# Altium PCB Guitar Input PCB.PcbDoc
Units mil, origin at the board's own origin, x right, y up, seen from the top; angles counter-clockwise.
Board outline 1700 x 1000 mil, 2 copper layers (Top Layer, Bottom Layer); 19 components, 10 nets, 49 pads, 17 vias.
Unrouted connection lines stored in the file: 9.
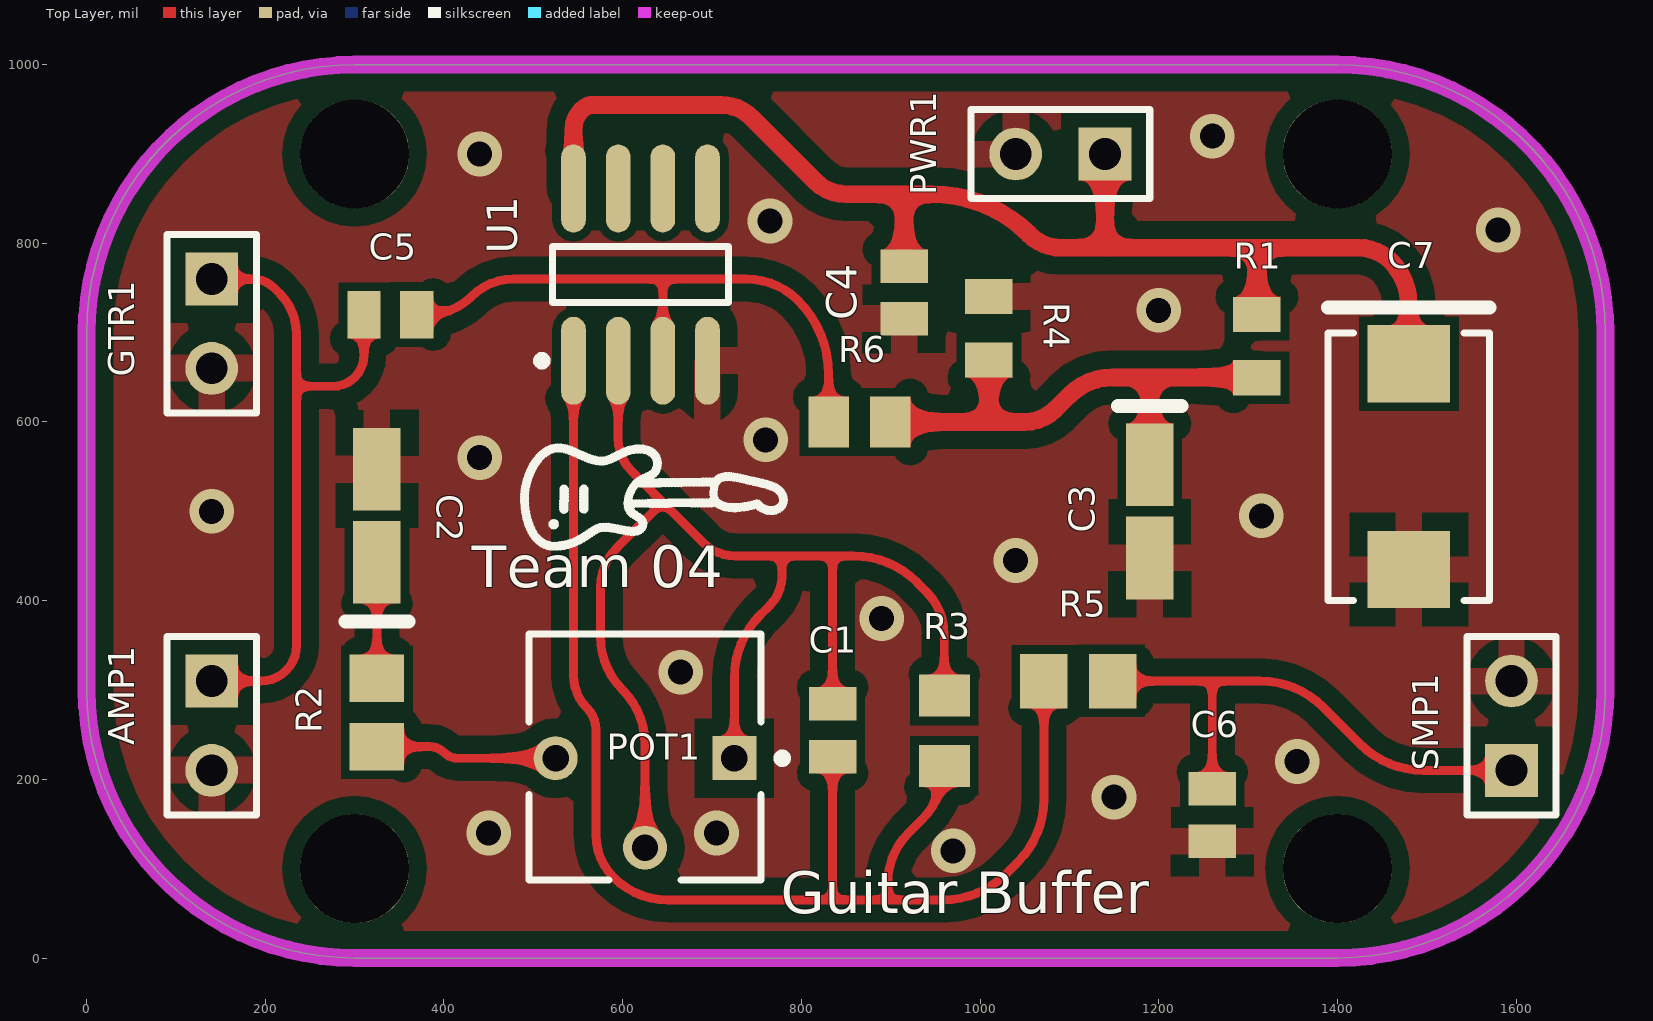
[diagram p0: Top Layer view]
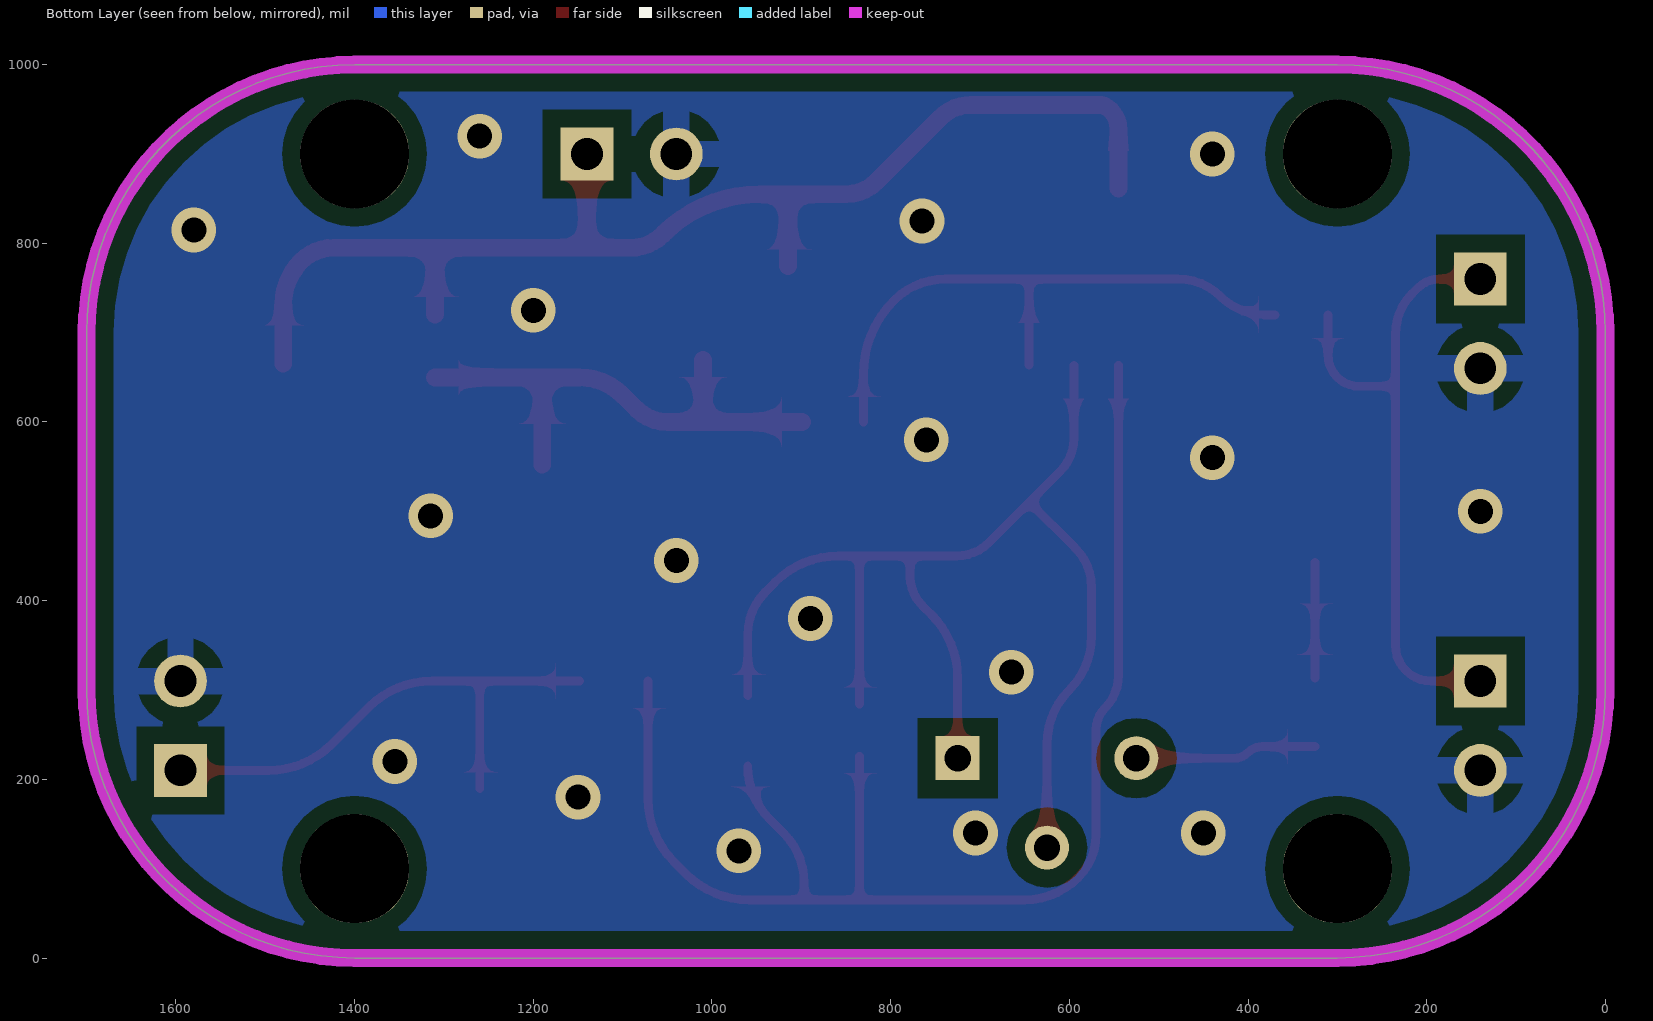
[diagram p1: Bottom Layer view, seen from below]

## Layer stack, top to bottom
Top Solder: solder mask 0.4, Solder Resist, Dk 3.5
Top Layer: signal copper 1.4
Dielectric 1: dielectric 12.6, FR-4, Dk 4.8
Bottom Layer: signal copper 1.4
Bottom Solder: solder mask 0.4, Solder Resist, Dk 3.5

## Board outline
0,300 0,700 cw(c300,700) 300,1000 1400,1000 cw(c1400,700) 1700,700 1700,300 cw(c1400,300) 1400,0 300,0 cw(c300,300)

## Design rules (kind name [scope] priority, off if disabled: settings)
Clearance [All] p1: gap=10 ignorepadtopadclearanceinfootprint=FALSE except(0: Arc-Hole Track-Hole SMDPad-Hole THPad-Hole Via-Hole Fill-Hole Poly-Hole Region-Hole Text-Hole; 20: Arc-Fill Arc-Poly Arc-Region Track-Fill Track-Poly Track-Region THPad-Fill THPad-Poly THPad-Region Via-Fill Via-Poly Via-Region Fill-Fill Fill-Poly Fill-Region Poly-Poly Poly-Region Region-Region)
HoleSize [All] p1: absolutevalues=TRUE maxlimit=200 minlimit=1 maxpercent=80.000 minpercent=20.000
MinimumSolderMaskSliver [All] p1: minsoldermaskwidth=0
PolygonConnect [All] p1: thpad.connectstyle=Relief thpad.reliefconductorwidth=30 thpad.reliefentries=4 thpad.polygonreliefangle="90 Angle" thpad.airgapwidth=20 smdpad.connectstyle=Relief smdpad.reliefconductorwidth=30 smdpad.reliefentries=4 smdpad.polygonreliefangle="90 Angle" smdpad.airgapwidth=20 via.connectstyle=Direct via.reliefconductorwidth=30 via.reliefentries=4 via.polygonreliefangle="90 Angle" via.airgapwidth=20
RoutingVias [All] p1: holewidth=28 width=50 viastyle="Through Hole" minholewidth=28 minwidth=50 maxholewidth=28 maxwidth=50
SolderMaskExpansion [All] p1: expansion=4 istentingtop=FALSE
Width Width_1 [InNet('+2V5') OR InNet('+5V')] p1: maxlimit=30 minlimit=20 preferedwidth=25 minimp=50.000000 maximp=50.000000 favimp=50.000000
Width [All] p2: maxlimit=25 minlimit=10 preferedwidth=20 minimp=50.000000 maximp=50.000000 favimp=50.000000
28 further rules are at their usual default settings.

## Classes and differential pairs
component class "Guitar Input Schematic": C1 C2 C3 R1 R3 R4

## Components (designator, comment, footprint, x,y, rotation, side; value= is the part's Value field where it differs from the comment)
AMP1 "AMPLIFIER_INPUT" HDR1X2 140,310 r270 top
C1 "270pF" FP-C0805C-DN-MFG 835,255 r270 top value="270 pF"
C2 "10uF" KEMT-A-3216-18-2_M 325,495 r90 top
C3 "10uF" KEMT-A-3216-18-2_M 1190,500 r270 top
C4 "100 nF" FP-C0805C-DN-MFG 915,745 r270 top value="0.10 μF"
C5 "100nF" FP-C0805C-DN-MFG 340,720 r0 top value="0.10 μF"
C6 "270pF" FP-C0805C-DN-MFG 1260,160 r90 top value="270 pF"
C7 "100 uF" KEMT-T491-D_L 1480,550 r270 top
GTR1 "GUITAR_OUTPUT" HDR1X2 140,760 r270 top
POT1 "100K" BOUR-3362P 625,225 r180 top
PWR1 "POWER" HDR1X2 1140,900 r180 top
R1 "10K" RESC2013X60X35NL10T20 1310,685 r90 top
R2 "470" RESC2013X70X40ML20T20 325,275 r270 top
R3 "100K" RESC2013X60X35ML10T20 960,254.37 r270 top
R4 "10K" RESC2013X60X35NL10T20 1010,705 r270 top
R5 "470" RESC2013X70X40ML20T20 1110,310 r0 top
R6 "1M" RESC2013X70X40NL20T20 865,600 r180 top
SMP1 "SAMPLED_SIGNAL" HDR1X2 1595,210 r90 top
U1 "MCP6002" SOIC-SN8_M 620,765 r90 top

## Footprints (in the part's own frame and the unit in brackets; to place one, negate y for a bottom-side part, rotate by r counter-clockwise, add the part's x,y. Pads: shape width x height; smd on the part's side, far side on the other; paste and mask are expansions set on the pad)
BOUR-3362P [mm] "THD, 3-Leads, Body 6.6x6.99mm, Pitch 2.54mm"
  rect 1.25x1.25 hole 0.75: 1(-2.54,0.035)
  round 1.25 hole 0.75: 2(0,2.575) 3(2.54,0.035)
  silkscreen extent -4.03,-3.49 3.3,3.5, body extent -3.3,-3.49 3.3,3.49, height 4.95
FP-C0805C-DN-MFG [mm]
  rect 0.95x1.35 smd paste+0 mask+0: 1(-0.75,0) 2(0.75,0)
  body extent -1.4,-0.85 1.4,0.85, height 0.25
HDR1X2 [mm] "Connector; Header; 2 Position"
  rect 1.5x1.5 hole 0.9: 1(0,0)
  round 1.5 hole 0.9: 2(2.54,0)
  silkscreen extent -1.27,-1.27 3.81,1.27
KEMT-A-3216-18-2_M [mm] "Molded TAN Capacitor, 2-Leads, Body 3.4x1.8mm, IPC Low Density"
  rect 2.35x1.35 smd: 1(-1.325,0) 2(1.325,0)
  silkscreen extent -3,-0.9 -3,0.9, body extent -1.7,-0.9 1.7,0.9, height 1.8
KEMT-T491-D_L [mm] "Molded Capacitor, 2-Leads, Body 7.60x4.60mm, IPC High Density"
  rect 2.2x2.35 smd: 1(-2.925,0) 2(2.925,0)
  silkscreen extent -4.52,-2.3 3.8,2.3, body extent -3.8,-2.3 3.8,2.3, height 3.1
RESC2013X60X35ML10T20 [mm] "Chip Resistor, 2-Leads, Body 2.1x1.35mm, IPC Low Density"
  rect 1.2x1.45 smd: 1(-1,0) 2(1,0)
  body extent -1.05,-0.68 1.05,0.67, height 0.6
RESC2013X60X35NL10T20 [mm] "Chip Resistor, 2-Leads, Body 2.1x1.35mm, IPC Medium Density"
  rect 1x1.35 smd: 1(-0.9,0) 2(0.9,0)
  body extent -1.05,-0.68 1.05,0.67, height 0.6
RESC2013X70X40ML20T20 [mm] "Chip Resistor, 2-Leads, Body 2.00x1.25mm, IPC Low Density"
  rect 1.35x1.55 smd: 1(-0.975,0) 2(0.975,0)
  body extent -1.1,-0.72 1.1,0.72, height 0.7
RESC2013X70X40NL20T20 [mm] "Chip Resistor, 2-Leads, Body 2.2x1.35mm, IPC Medium Density"
  rect 1.15x1.45 smd: 1(-0.875,0) 2(0.875,0)
  body extent -1.1,-0.72 1.1,0.72, height 0.7
SOIC-SN8_M [mm] "SOIC, 8-Leads, Body 4.9x3.9mm, Pitch 1.27mm, IPC Low Density"
  oval 2.5x0.7 smd: 1(-2.45,1.905) 2(-2.45,0.635) 3(-2.45,-0.635) 4(-2.45,-1.905) 5(2.45,-1.905) 6(2.45,-0.635) 7(2.45,0.635) 8(2.45,1.905)
  silkscreen extent -2.57,-2.5 0.8,2.93, body extent -2,-2.5 2,2.5, height 1.75

## Part data
AMP1 GTR1 PWR1 SMP1: library part "Header 2", "Header, 2-Pin", LatestRevisionDate=17-Jul-2002, LatestRevisionNote="Re-released for DXP Platform.", Publisher="Altium Limited"
C1 C6: library part CMP-1036-02406-3, "CAP CER 270PF 50V C0G/NP0 0805", Capacitance="270 pF", Manufacturer=KEMET, Manufacturer Part Number=C0805C271J5GACTU, Package=C0805C-DN, Temperature="-55°C to +125°C", Temperature Characteristic=C0G, Temperature Coefficient=30ppm/°C, Temperature Range High=+125°C, Temperature Range Low=-55°C, Tolerance=0.05, Voltage Rating="50 V", Automotive=No, Category=Cap, ComponentLink2Description=Datasheet, ComponentLink2URL=https://content.kemet.com/datasheets/KEM_C1003_C0G_SMD.pdf, Device Class L1="Passive Components", Device Class L2=Capacitors, Device Class L3="Ceramic Capacitors", Digikey Description="CAP CER 270PF 50V C0G/NP0 0805", Height=0.88mm, Ipc Land Pattern Name=CAPC200125X78, Lead Free=Yes, Material=Ceramic, Mouser Description="Multilayer Ceramic Capacitors MLCC - SMD/SMT 50volts 270pF C0G 5%", Octopart=https://octopart.com/c0805c271j5gactu-kemet-104903, RoHS=TRUE
C2 C3: library part CMP-2000-05172-1, "Capacitor, Tantalum, 10 uF, +/- 10%, 10 V, -55 to 125 degC, 2-Pin SMD (1206), RoHS, Tape and Reel", Capacitance=10µF, ESR (Equivalent Series Resistance)=3.8Ohm, Lifetime @ Temp.=2000Hrs@85degC, Manufacturer=Kemet, Manufacturer Size Code=A, Operating Temperature=-55degC~125degC, Package / Case=1206(3216Metric), Package Description="2-Pin Surface Mount Device, Body 3.2 x 1.6 mm", Package Reference=1206, Standard Package=2,000, Tolerance=±10%, Voltage - Rated=10V, Catalog Drawings=T49x,T5xxSeries_A-side1T49x,T5xxSeries_A,B-side2T49x,T5xxSeries_A,SBottom, Category=Capacitors, Datasheet URL=http://www.farnell.com/datasheets/1824869.pdf, Datasheet Version=Apr-14, Family=TantalumCapacitors, Features=GeneralPurpose, Height - Seated (Max)="0.071\"(1.80mm)", Lead Spacing=-, Manufacturer URL=http://www.kemet.com/, Mounting Type=SurfaceMount, Online Catalog=T491Series, Other Names=399-3684-2, Packaging=Tape&Reel(TR), Product Training Modules=CapacitorBasics-TypicalUsesforCapacitorsDeratingGuidelinesforSurfaceMountTantalumCapacitors, Series=T491, Size / Dimension="0.126\"Lx0.063\"W(3.20mmx1.60mm)", Type=Molded
C4 C5: library part CMP-2007-00279-2, "CAP CER 0.1UF 50V X7R 0805", Capacitance="0.10 μF", Manufacturer=KEMET, Manufacturer Part Number=C0805C104K5RACTU, Package=C0805C-DN, Temperature="-55°C to +125°C", Temperature Characteristic=X7R, Temperature Coefficient=30ppm/°C, Temperature Range High=+125°C, Temperature Range Low=-55°C, Tolerance=0.1, Voltage Rating="50 V", Automotive=No, Category=Cap, ComponentLink2Description=Datasheet, ComponentLink2URL=https://content.kemet.com/datasheets/KEM_C1003_C0G_SMD.pdf, Device Class L1="Passive Components", Device Class L2=Capacitors, Device Class L3="Ceramic Capacitors", Digikey Description="CAP CER 0.1UF 50V X7R 0805", Height=0.88mm, Ipc Land Pattern Name=CAPC200125X78, Lead Free=Yes, Material=Ceramic, Mouser Description="Cap Ceramic 0.1uF 50V X7R 10% SMD 2.0 x 1.2 mm 125 C Paper T/R", Octopart=https://octopart.com/c0805c104k5ractu-kemet-143926, RoHS=TRUE
C7: library part CMP-2000-07541-1, "Tantalum Surface Mount Capacitor, 100 uF, +/- 10%, 16 V, -55 to 125 degC, 2917 (7343 Metric), RoHS, Tape and Reel", Capacitance=100uF, Case Code (Imperial)=2917, Case Code (Metric)=7343, Case\/Package=Molded, Dielectric Material=Tantalum, ESR (Equivalent Series Resistance)=700mOhm, Leakage Current=16uA, Manufacturer=Kemet, Max Operating Temperature=125degC, Min Operating Temperature=-55degC, Package Description="2-Pin Surface Mount Device, Body 7.3 x 4.3 mm", Package Quantity=1, Package Reference=T491-D, Ripple Current=463mA, Tolerance=10%, Voltage=16V, Datasheet URL=http://www.kemet.com/Lists/ProductCatalog/Attachments/254/KEM_T2005_T491.pdf, Datasheet Version=07/2017, Depth=4.3mm, Dissipation Factor=8%, Height=2.8mm, Height - Seated (Max)=0.122inch, Lead Free=LeadFree, Lead Pitch=3.6mm, Length=7.3mm, Life (Hours)=2000Hour, Manufacturer URL=http://www.kemet.com/, Mount=PCB, Mounting Technology=SurfaceMount, Packaging=TapeandReel, Polarity=Polar, Radiation Hardening=No, REACH SVHC=NoSVHC, RoHSCompliant=true, Termination=SMD/SMT, Voltage Rating=16V, Voltage Rating (DC)=16V, Weight=0.023634oz, Width=4.3mm
POT1: library part CMP-1747-00003-1, "Square Trimpot(R) Trimming Potentiometer, 100 KOhm, 300 V, -55 to 125 degC, 3-Pin THD, RoHS, Tube", Case\Package=Axial, Max Operating Temperature="155 degC", Min Operating Temperature="-55 degC", Package Quantity=200, Power Rating="250 mW", Resistance="1 mohm", Tolerance=1%, Voltage Rating="250 V", ComponentLink1Description="Manufacturer URL", ComponentLink1URL=http://www.bourns.com/, ComponentLink2Description=Datasheet, ComponentLink2URL=http://www.bourns.com/docs/Product-Datasheets/3362.pdf, DatasheetVersion=May-16, Length="0.248 inch", Mount="Through Hole", PackageDescription="3-Pin Through Hole Device, Body 6.6 x 6.99 mm, Pitch 2.54 mm", PackageReference=3326P, Packaging=Bulk, RoHSCompliant=true
R1 R4: library part CMP-1659-00013-4, "Chip Resistor, 10 KOhm, +/- 1%, 0.125 W, -55 to 155 degC, 0805 (2012 Metric), RoHS, Tape and Reel", Manufacturer=Yageo, Max Operating Temperature="155 degC", Min Operating Temperature="-55 degC", Package Quantity=5000, Voltage Rating="150 V", ComponentLink1Description="Manufacturer URL", ComponentLink1URL=http://www.yageo.com/, ComponentLink2Description=Datasheet, ComponentLink2URL=http://www.yageo.com/documents/recent/PYu-RC_Group_51_RoHS_L_04.pdf, DatasheetVersion="Rev. 4, 02/2016", Height="0.5 mm", Length="2 mm", Mount="Surface Mount", Mounting Technology="Surface Mount", PackageDescription="2-Pin Surface Mounted Device, Body 2 x 1.25 mm", PackageReference=0805, Packaging="Tape and Reel", Pins=2, REACH SVHC="No SVHC", RoHSCompliant=true
R2 R5: library part CMP-2001-00549-5, "Chip Resistor, 470 Ohm, +/- 1%, 0.125 W, -55 to 155 degC, 0805 (2012 Metric), RoHS, Tape and Reel", Manufacturer=Panasonic, Max Operating Temperature="155 degC", Min Operating Temperature="-55 degC", Package Quantity=1, Voltage Rating="150 V", ComponentLink1Description="Manufacturer URL", ComponentLink1URL=http://www.panasonic.com/, ComponentLink2Description=Datasheet, ComponentLink2URL=http://industrial.panasonic.com/cdbs/www-data/pdf/RDA0000/AOA0000C86.pdf, DatasheetVersion=04/2015, Height="0.6 mm", Length="2 mm", Mount="Surface Mount", Mounting Technology="Surface Mount", PackageDescription="2-Pin Surface Mount Device, Body 2 x 1.25 mm", PackageReference=0805, Packaging="Cut Tape", Pins=2, REACH SVHC=Yes, RoHSCompliant=true
R3: library part CMP-2100-03668-1, "Chip Resistor, 100 KOhm, +/- 1%, 0.125 W, -55 to 155 degC, 0805 (2012 Metric), RoHS, Tape and Reel", Case Code (Imperial)=0805, Case Code (Metric)=2012, Manufacturer=Yageo, Max Operating Temperature=155degC, Max Power Dissipation=125mW, Min Operating Temperature=-55degC, Package Description="2-Pin Surface Mounted Device, Body 2 x 1.25 mm", Package Quantity=1, Resistance=100KOhm, Temperature Coefficient=100ppm/degreesC, Tolerance=1%, Voltage Rating=150V, Case/Package=0805, Composition=ThickFilm, Datasheet URL=http://www.yageo.com/NewPortal/yageodocoutput?fileName=/pdf/R-Chip/PYu-RC_Group_51_RoHS_L_5.pdf, Datasheet Version="Rev. 5, 10/2016", Depth=1.25mm, Height=0.024inch, Lead Free=LeadFree, Lead Pitch=0.4mm, Length=2mm, Manufacturer URL=http://www.yageo.com/, Military Standard=Not, Number of Pins=2, Number of Terminations=2, Package Reference=0805, Packaging=TapeandReel, Power Rating=125mW, REACH SVHC=Unknown, RoHSCompliant=true, Termination=SMD/SMT, Voltage Rating (DC)=150V, Width=0.049inch
R6: library part CMP-2001-04378-5, "Chip Resistor, 1000 KOhm, +/- 1%, 0.125 W, -55 to 155 degC, 0805 (2012 Metric), RoHS, Tape and Reel", Manufacturer=Panasonic, Max Operating Temperature="155 degC", Min Operating Temperature="-55 degC", Package Quantity=5000, Voltage Rating="150 V", ComponentLink1Description="Manufacturer URL", ComponentLink1URL=http://www.panasonic.com/, ComponentLink2Description=Datasheet, ComponentLink2URL=http://industrial.panasonic.com/cdbs/www-data/pdf/RDA0000/AOA0000C86.pdf, DatasheetVersion=04/2015, Height="0.6 mm", Length="2 mm", Mount="Surface Mount", Mounting Technology="Surface Mount", PackageDescription="2-Pin Surface Mount Device, Body 2 x 1.25 mm", PackageReference=0805, Packaging="Tape and Reel", Pins=2, REACH SVHC=Yes, RoHSCompliant=true
U1: library part CMP-0187-00368-2, "1 MHz, Low-Power Operational Amplifier, 8-Pin SOIC, Extended Temperature", Code_IPC=SOIC127P600-8, Code_JEDEC=MS-012, ComponentLink1Description="Manufacturer URL", ComponentLink1URL=http://www.microchip.com/, ComponentLink2Description=Datasheet, ComponentLink2URL=http://ww1.microchip.com/downloads/en/DeviceDoc/21733j.pdf, ComponentLink3Description="Package Specification", ComponentLink3URL=http://www.microchip.com/stellent/groups/techpub_sg/documents/packagingspec/en012702.pdf, DatasheetVersion="revJ, Nov-2009", PackageDescription="8-Lead Plastic Small Outline (SN) - Narrow, 3.90mm Body [SOIC]", PackageReference=SOIC-SN8, PackageVersion="revBB, Aug-2009", RevisionNote="URLs added."

## Free pads (board coordinates)
  round 122.05 hole 122.05: MNT(300,100) MNT(300,900) MNT(1400,100) MNT(1400,900)

## Via types
v1: diameter 50, hole 28, Top Layer to Bottom Layer, tented both sides, 17 vias

## Nets (pads, with @x,y where several pads share a name; then routed paths per layer and width w, separated by ;. In a path a pad name is that pad's centre, name@x,y a point inside that pad or via, vN(x,y) a via of type N, cw(c..) or ccw(c..) an arc to the next point about the centre after c; other vN are vias at no path point)
+2V5: C3.1 R1.1 R4.2 R6.1 | length 593.6
  Top Layer w20: R6.1 1010,600 ; R4.2 1010,600 ; C3.1 1190,650 ; R1.1@1310,650 1190,650 ; 1010,600 1050,600 ccw(c1050,648.28) 1084.14,614.14 1100,630 cw(c1148.28,581.72) 1148.28,650 1190,650
+5V: C4.1 C7.1 PWR1.1 R1.2 U1.8 | length 1435.3
  Top Layer w20: U1.8 545,927.93 cw(c574.14,927.93) 553.54,948.54 555,950 cw(c567.07,937.93) 567.07,955 709.79,955 cw(c709.79,906.21) 744.29,940.71 815.86,869.14 ccw(c850,903.28) 850,855 915,855 ; C4.1 915,855 ; PWR1.1 1140,795 ; R1.2 1310,795 ; C7.1 1480,731.72 ccw(c1411.72,731.72) 1460,780 ccw(c1423.79,743.79) 1423.79,795 1310,795 ; 915,855 946.36,855 cw(c946.36,701.36) 1055,810 ccw(c1091.21,846.21) 1091.21,795 1140,795 ; 1140,795 1310,795
GND: AMP1.2 C2.2 C3.2 C4.2 C6.1 C7.2 GTR1.2 PWR1.2 R4.1 SMP1.2 U1.4
  other v1: 970,120 450,140 705,140 1150,180 1355,220 665,320 890,380 1040,445 1315,495 140,500 440,560 760,580 1200,725 1580,815 765,825 440,900 1260,920
NetAMP1_1: AMP1.1 C5.1 GTR1.1 | length 738.5
  Top Layer w10: AMP1.1 195,310 ccw(c195,350) 223.24,321.67 ccw(c195,350) 235,350 235,640 ; GTR1.1 185.86,760 cw(c185.86,725.86) 210,750 215.86,744.14 cw(c169.64,697.93) 235,697.93 235,640 ; C5.1 310.47,675.28 cw(c274.72,675.28) 300,650 cw(c275.86,674.14) 275.86,640 235,640
NetC1_1: C1.1 POT1.1 POT1.2 R3.1 U1.2 | length 1457.4
  Top Layer w10: U1.2@595,663.54 595,581.42 ccw(c646.72,581.42) 610.15,544.85 644.64,510.36 ; POT1.2 625,239.64 ccw(c539.64,239.64) 600,300 cw(c660.36,360.36) 575,360.36 575,414.64 cw(c637.93,414.64) 593.43,459.14 644.64,510.36 ; POT1.1 725,313.58 cw(c825,313.58) 754.29,384.29 765,395 ccw(c733.11,426.89) 778.21,426.89 778.21,450 ; C1.1 835,450 ; R3.1 960,361.72 ccw(c891.72,361.72) 940,410 929.29,420.71 ccw(c858.58,350) 858.58,450 835,450 ; 644.64,510.36 655,500 689.85,465.15 ccw(c726.42,501.72) 726.42,450 778.21,450 ; 778.21,450 835,450
NetC1_2: C1.2 R3.2 R5.1 U1.1 | length 1597.9
  Top Layer w10: U1.1@545,663.54 545,316.21 ccw(c596.21,316.21) 560,280 cw(c535.86,255.86) 570,255.86 570,138.28 ccw(c638.28,138.28) 590,90 ccw(c650.36,150.36) 650.36,65 835,65 ; C1.2 835,65 ; R3.2 cw(c875.5,215) 935.25,155.25 920,140 ccw(c976.04,83.96) 896.79,83.96 896.79,65 ; R5.1 1071.61,178.04 cw(c971.61,178.04) 1042.32,107.32 1029.29,94.29 cw(c958.58,165) 958.58,65 896.79,65 ; 835,65 896.79,65
NetC2_1: C2.1 R2.1 | length 129.4
  Top Layer w10: R2.1 C2.1
NetC5_2: C5.2 R6.2 U1.3 | length 685.5
  Top Layer w10: C5.2 381.72,720 ccw(c381.72,788.28) 430,740 cw(c478.28,691.72) 478.28,760 645,760 ; U1.3@645,663.54 645,760 ; R6.2 830.55,653.25 830.55,653.31 ccw(c713.46,653.31) 796.21,736.16 ccw(c738.58,678.43) 738.58,760 645,760
NetC6_2: C6.2 R5.2 SMP1.1 | length 599.9
  Top Layer w10: R5.2 1260,310 ; C6.2 1260,310 ; SMP1.1 1496.42,210 cw(c1496.42,310) 1425.71,239.29 1384.29,280.71 ccw(c1313.58,210) 1313.58,310 1260,310
NetPOT1_3: POT1.3 R2.2 | length 203.5
  Top Layer w10: R2.2 384.03,236.61 cw(c384.03,214.03) 400,230 ccw(c415.4,245.4) 415.4,223.62 POT1.3
pads on no net: U1.5 U1.6 U1.7

## Polygon pours and split planes (outlines as drawn)
GND on Top Layer "GND_L01_P000" (solid, pour order 0): 0,300 0,700 cw(c300,700) 300,1000 1400,1000 cw(c1400,700) 1700,700 1700,300 cw(c1400,300) 1400,0 300,0 cw(c300,300)
GND on Bottom Layer "GND_L02_P001" (solid, pour order 1): 0,300 0,700 cw(c300,700) 300,1000 1400,1000 cw(c1400,700) 1700,700 1700,300 cw(c1400,300) 1400,0 300,0 cw(c300,300)

## Keep-outs
Keep-Out Layer:
  the board outline again, w20

## Silkscreen, mask and mechanical layers (free items; w line width, h text height)
Top Overlay:
  drawing of 4 lines, arcs and shapes, not listed
  text "Team 04" at 431.19,399.46 h80
  text "Guitar Buffer" at 776.92,34.62 h80
Mechanical 1:
  the board outline again, w10